# Altium PCB MIN_MOW_03 IR_V3 PCB.PcbDoc
Units mm, origin at the board's own origin, x right, y up, seen from the top; angles counter-clockwise.
Board outline 12.5 x 38 mm, 4 copper layers (Top Layer, Mid-Layer 1, Mid-Layer 2, Bottom Layer), stack 1 mm thick; 44 components, 22 nets, 95 pads, 52 vias.
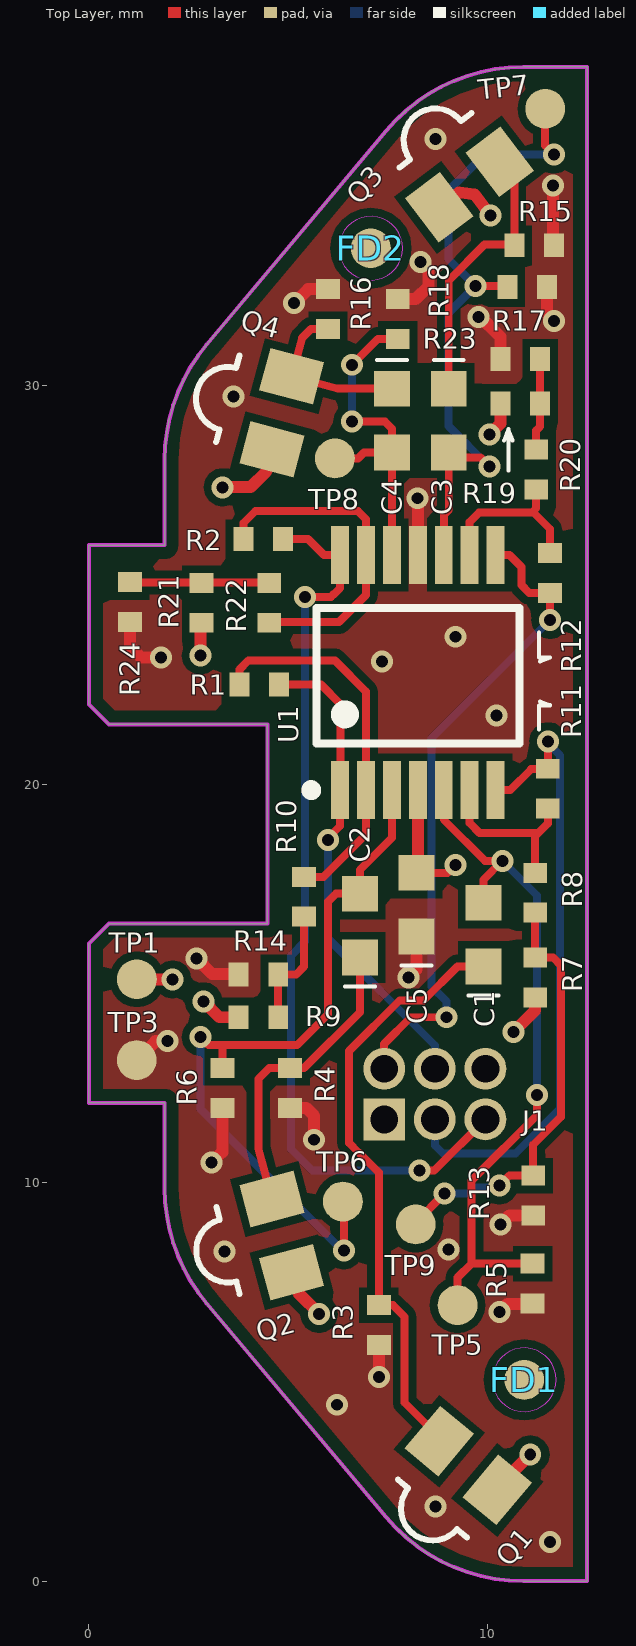
[diagram p0: Top Layer view]
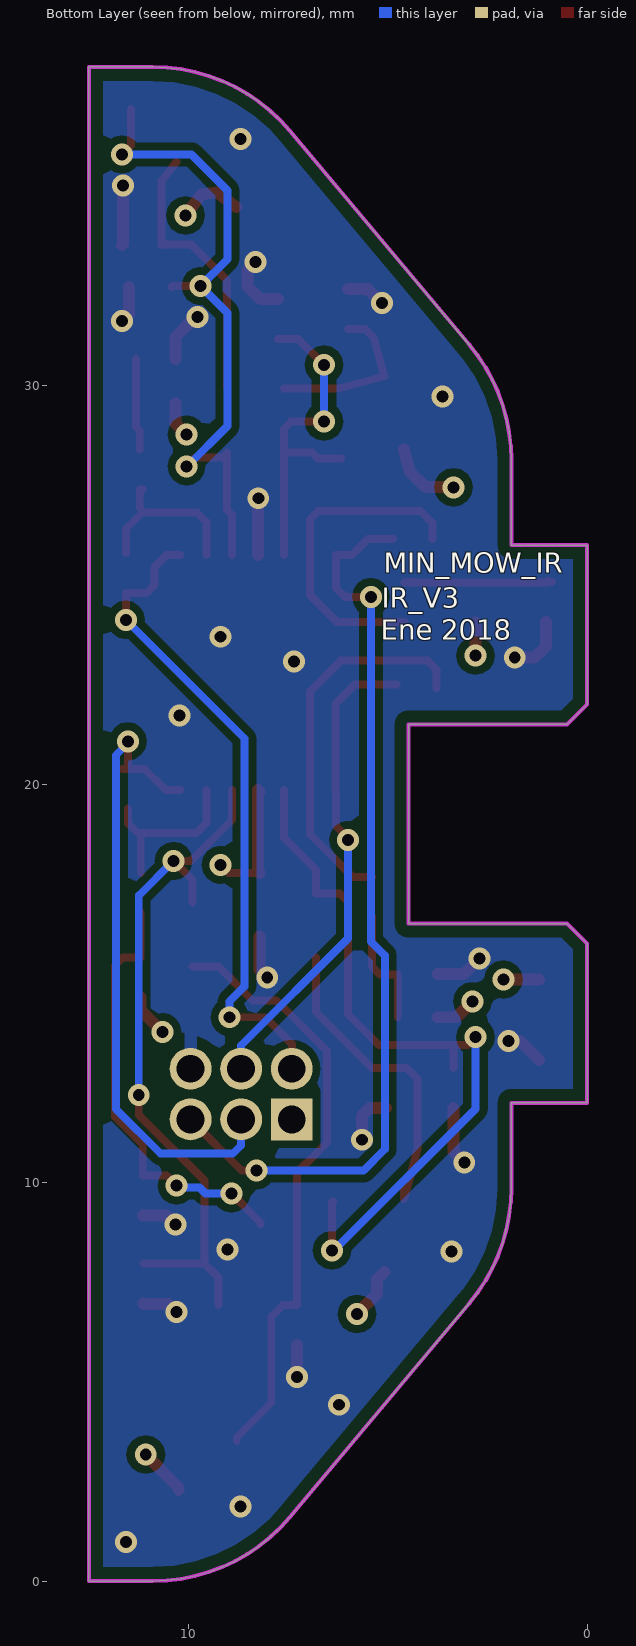
[diagram p1: Bottom Layer view, seen from below]
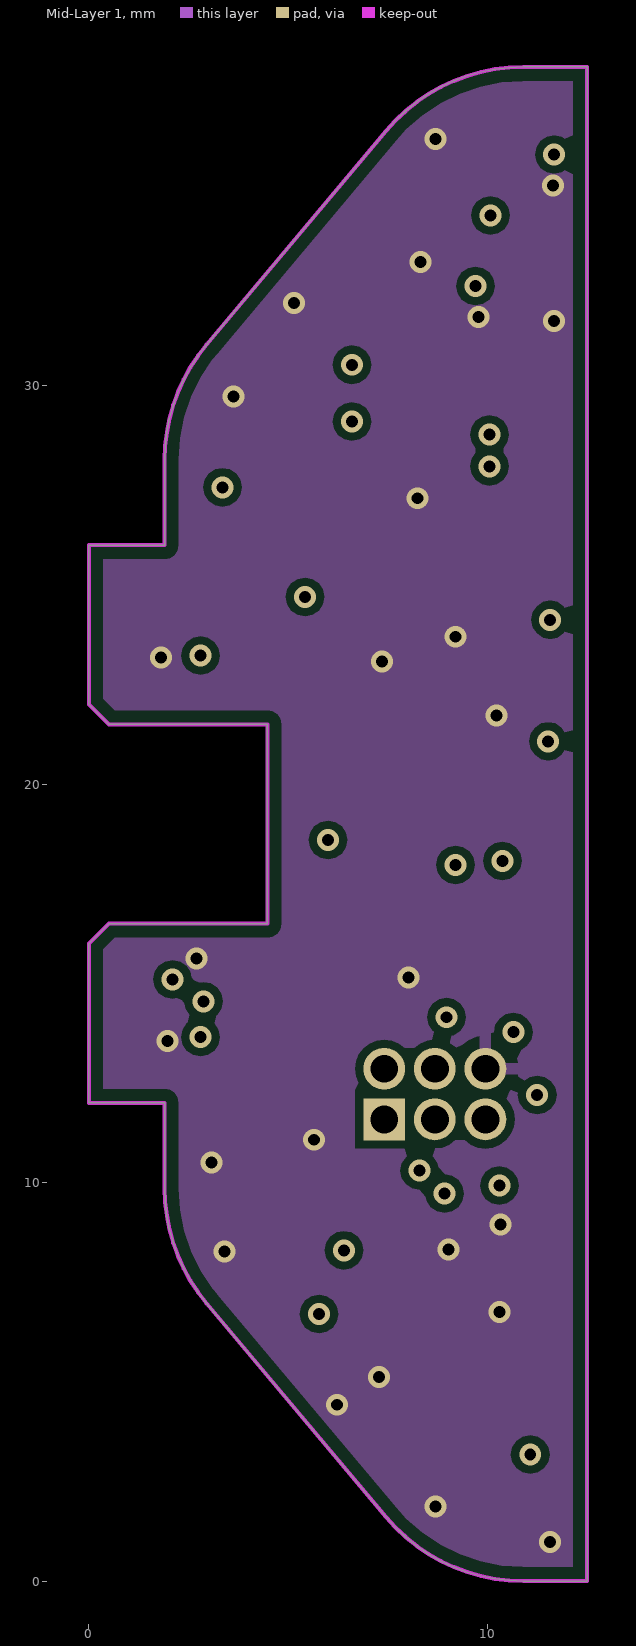
[diagram p2: Mid-Layer 1]
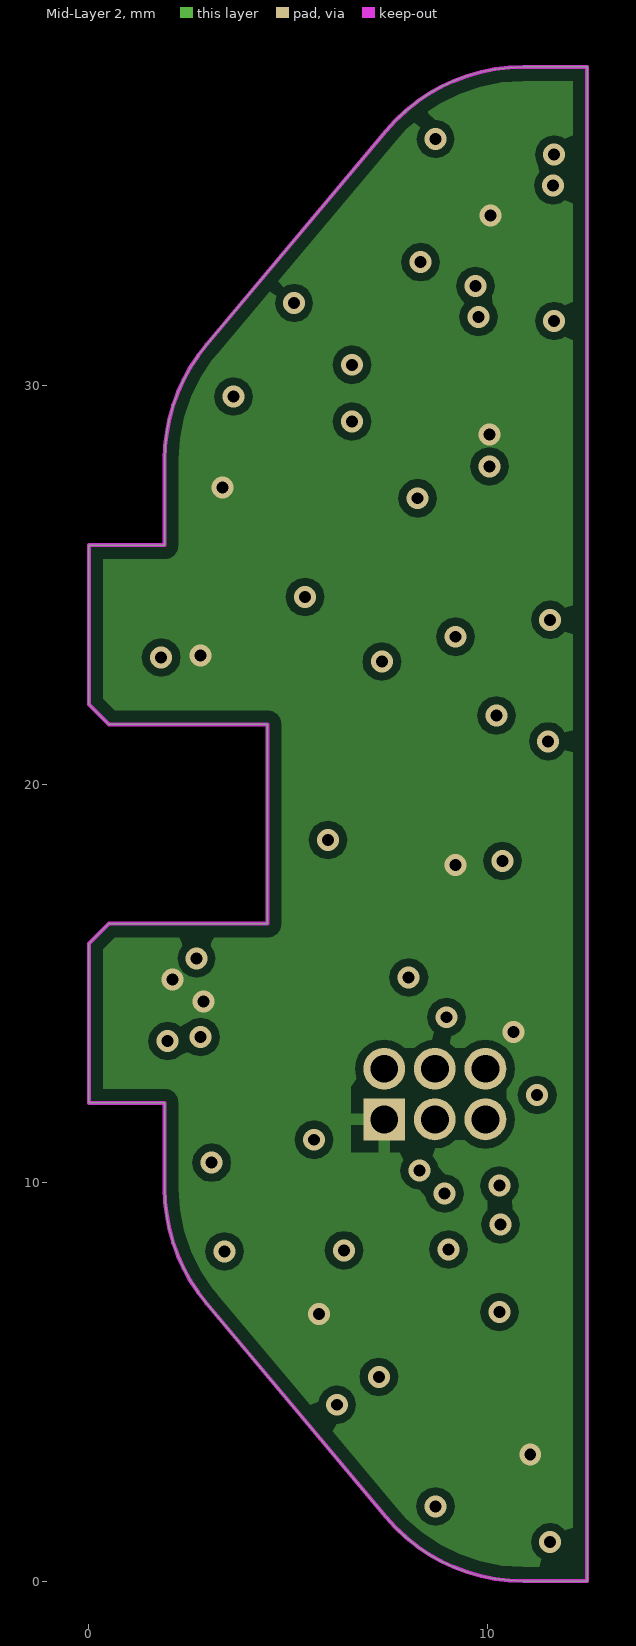
[diagram p3: Mid-Layer 2]
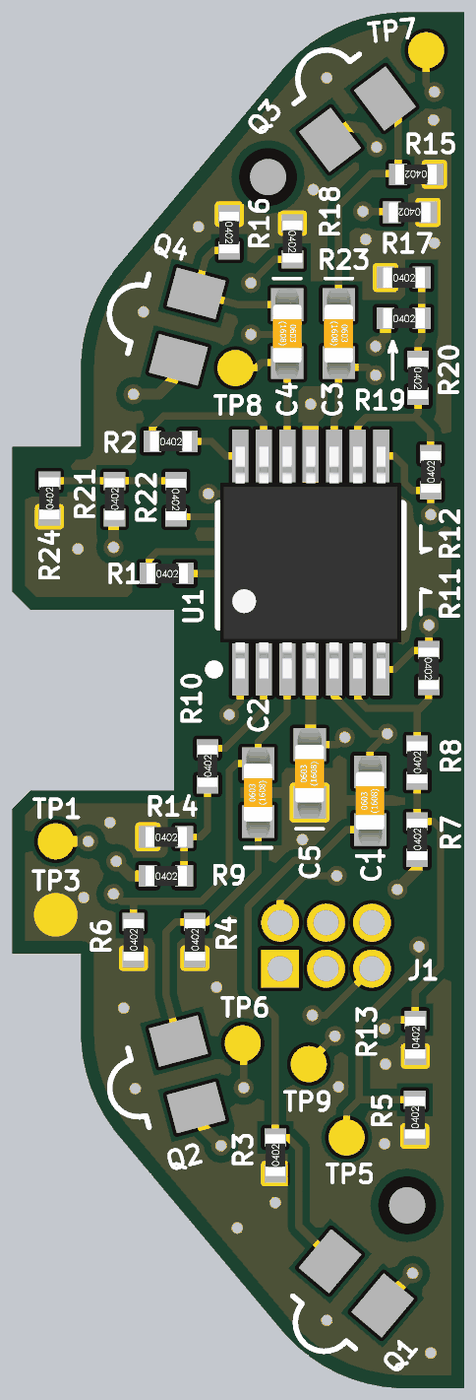
[diagram p4: 3D render of the assembled board from above, using the file's embedded part models]

## Layer stack, top to bottom
Top Layer: signal copper 0.035
Dielectric1: prepreg 0.18, Dk 4.2
Mid-Layer 1: signal copper 0.035
Dielectric 2: core 0.5, Dk 4.2
Mid-Layer 2: signal copper 0.035
Dielectric 2: prepreg 0.18, Dk 4.2
Bottom Layer: signal copper 0.035

## Board outline
0,12 0,16 0.5,16.5 4.48,16.5 4.48,21.5 0.5,21.5 0,22 0,26 1.9,26 1.9,28.137 cw(c6.4,28.137) 2.953,31.03 7.453,36.392 cw(c10.9,33.5) 10.9,38 12.5,38 12.5,0 10.9,0 cw(c10.9,4.5) 7.453,1.607 2.953,6.97 cw(c6.4,9.863) 1.9,9.863 1.9,12

## Design rules (kind name [scope] priority, off if disabled: settings)
Clearance Clearance_Antenna [InNetClass('Antenna')] p1: gap=0.2 ignorepadtopadclearanceinfootprint=FALSE except(0: Arc-Hole Track-Hole SMDPad-Hole THPad-Hole Via-Hole Fill-Hole Poly-Hole Region-Hole Text-Hole)
Clearance Clearance_Contorno [All vs (OnLayer('Keep-Out Layer'))] p2: gap=0.5 ignorepadtopadclearanceinfootprint=FALSE except(0: Arc-Hole Track-Hole SMDPad-Hole THPad-Hole Via-Hole Fill-Hole Poly-Hole Region-Hole Text-Hole; 0.3: Arc-Fill Arc-Poly Arc-Region Track-Fill Track-Poly Track-Region SMDPad-Fill SMDPad-Poly SMDPad-Region THPad-Fill THPad-Poly THPad-Region Via-Fill Via-Poly Via-Region Fill-Fill Fill-Poly Fill-Region Poly-Poly Poly-Region Region-Region)
Clearance Clearance_Poly [All vs IsRegion] p3: gap=0.2 ignorepadtopadclearanceinfootprint=FALSE except(0: Arc-Hole Track-Hole SMDPad-Hole THPad-Hole Via-Hole Fill-Hole Poly-Hole Region-Hole Text-Hole)
Clearance [All] p4: gap=0.2 ignorepadtopadclearanceinfootprint=FALSE except(0: Arc-Hole Track-Hole SMDPad-Hole THPad-Hole Via-Hole Fill-Hole Poly-Hole Region-Hole Text-Hole)
HoleSize [All] p1: absolutevalues=TRUE maxlimit=5 minlimit=0.3 maxpercent=80.000 minpercent=20.000
HoleToHoleClearance [All] p1: gap=0.4 allowstackedmicrovias=TRUE
MinimumSolderMaskSliver [InComponent('J1') vs InComponent('J1')] p1: minsoldermaskwidth=0
PlaneClearance [All] p1: clearance=0.4
PlaneConnect [All] p1: planeconnectstyle=Direct reliefexpansion=0.2 reliefentries=4 reliefconductorwidth=0.25 reliefairgap=0.25
PolygonConnect PolygonConnect_1 [InComponent('J1')] p1: connectstyle=Relief reliefconductorwidth=0.3 reliefentries=4 polygonreliefangle="90 Angle" airgapwidth=0.3
PolygonConnect [All] p2: connectstyle=Direct reliefconductorwidth=0.254 reliefentries=4 polygonreliefangle="90 Angle" airgapwidth=0.254
RoutingVias [All] p1: holewidth=0.4 width=0.8 viastyle="Through Hole" minholewidth=0.3 minwidth=0.66 maxholewidth=0.6 maxwidth=1.2
SilkToSilkClearance SilkToSilkClearance_2 [InComponent('C1') vs InComponent('C1')] p1: silktosilkclearance=0.01
SilkToSilkClearance SilkToSilkClearance_1 [InComponent('R19') vs InComponent('R20','R23')] p2: silktosilkclearance=0
SilkToSilkClearance [All] p3: silktosilkclearance=0.15
SilkToSolderMaskClearance SilkToSolderMaskClearance_8 [InComponent('TP7') vs InComponent('TP7')] p1: minsilkscreentomaskgap=0.01 clearancetoexposedcopper=TRUE
SilkToSolderMaskClearance SilkToSolderMaskClearance_7 [InComponent('FD4') vs InComponent('Q3')] p2: minsilkscreentomaskgap=0.01 clearancetoexposedcopper=TRUE
SilkToSolderMaskClearance SilkToSolderMaskClearance_6 [InComponent('R18') vs InComponent('R18')] p3: minsilkscreentomaskgap=0.01 clearancetoexposedcopper=TRUE
SilkToSolderMaskClearance SilkToSolderMaskClearance_5 [InComponent('TP2','TP3') vs InComponent('TP2','TP3')] p4: minsilkscreentomaskgap=0.01 clearancetoexposedcopper=TRUE
SilkToSolderMaskClearance SilkToSolderMaskClearance_4 [InComponent('R7','R8') vs InComponent('R7','R8')] p5: minsilkscreentomaskgap=0.01 clearancetoexposedcopper=TRUE
SilkToSolderMaskClearance SilkToSolderMaskClearance_3 [InComponent('R16') vs InComponent('R18','R16')] p6: minsilkscreentomaskgap=0.01 clearancetoexposedcopper=TRUE
SilkToSolderMaskClearance SilkToSolderMaskClearance_2 [InComponent('TP1') vs InComponent('TP1')] p7: minsilkscreentomaskgap=0.01 clearancetoexposedcopper=TRUE
SilkToSolderMaskClearance SilkToSolderMaskClearance_1 [InComponent('TP4') vs InComponent('TP1','TP4')] p8: minsilkscreentomaskgap=0.01 clearancetoexposedcopper=TRUE
SilkToSolderMaskClearance [IsPad] p9: minsilkscreentomaskgap=0.2 clearancetoexposedcopper=TRUE
SolderMaskExpansion [All] p1: expansion=0.102
Width Width_Antenna [InNetClass('Antenna')] p1: maxlimit=0.254 minlimit=0.254 preferedwidth=0.254
Width [All] p2: maxlimit=1 minlimit=0.15 preferedwidth=0.3 midlayer1_minwidth=0.254 midlayer1_maxwidth=0.254 midlayer1_prefwidth=0.254 midlayer2_minwidth=0.254 midlayer2_maxwidth=0.254 midlayer2_prefwidth=0.254 minimp=50.000000 maximp=50.000000 favimp=50.000000
23 further rules are at their usual default settings.

## Components (designator, comment, footprint, x,y, rotation, side; value= is the part's Value field where it differs from the comment)
C1 "C22NV10X7R0603" C0603 9.9,15.425 r90 top value=22nF
C2 "C22NV10X7R0603" C0603 6.8,15.65 r90 top value=22nF
C3 "C22NV10X7R0603" C0603 9.03,29.925 r270 top value=22nF
C4 "C22NV10X7R0603" C0603 7.605,29.925 r270 top value=22nF
C5 "C100NV10X7R0603" C0603 8.225,16.175 r90 top value=100nF
FD1 "FIDUCIAL" FIDUCIAL 10.925,5.05 r0 top
FD2 "FIDUCIAL" FIDUCIAL 7.075,33.45 r90 top
J1 "PAD_6PIN_3X2_1.05MM_1.27MM_PITCH" PAD_6PIN_3X2_1.05MM_1.27MM_PITCH 7.41,11.587 r0 top locked
Q1 "PT100MF0MP" PT100MF0MP_SIDE 9.519,2.898 r320 top locked value=35V/0.02A
Q2 "PT100MF0MP" PT100MF0MP_SIDE 4.84,8.669 r285 top locked value=35V/0.02A
Q3 "PT100MF0MP" PT100MF0MP_SIDE 9.549,35.047 r217 top locked value=35V/0.02A
Q4 "PT100MF0MP" PT100MF0MP_SIDE 4.84,29.319 r255 top locked value=35V/0.02A
R1 "R39KT10402" R0402 3.775,22.5 r0 top value=39kOhm
R2 "R39KT10402" R0402 3.875,26.15 r0 top value=39kOhm
R3 "R4K7T10402" R0402 7.275,5.925 r90 top value=4.7kOhm
R4 "R4K7T10402" R0402 5.05,11.875 r90 top value=4.7kOhm
R5 "R4K7T10402" R0402 11.135,6.966 r90 top value=4.7kOhm
R6 "R4K7T10402" R0402 3.35,11.875 r90 top value=4.7kOhm
R7 "R22KT10402" R0402 11.2,14.65 r90 top value=22kOhm
R8 "R1KT10402" R0402 11.2,16.775 r90 top value=1kOhm
R9 "R22KT10402" R0402 3.75,14.15 r0 top value=22kOhm
R10 "R1KT10402" R0402 5.4,16.675 r90 top value=1kOhm
R11 "R39KT10402" R0402 11.516,20.386 r270 top value=39kOhm
R12 "R39KT10402" R0402 11.575,24.8 r90 top value=39kOhm
R13 "R100T10402" R0402 11.15,9.175 r90 top value=100Ohm
R14 "R100T10402" R0402 3.75,15.225 r0 top value=100Ohm
R15 "R4K7T10402" R0402 11.675,33.525 r180 top value=4.7kOhm
R16 "R4K7T10402" R0402 6,32.425 r270 top value=4.7kOhm
R17 "R4K7T10402" R0402 11.5,32.475 r180 top value=4.7kOhm
R18 "R4K7T10402" R0402 7.75,32.175 r270 top value=4.7kOhm
R19 "R22KT10402" R0402 10.325,29.55 r0 top value=22kOhm
R20 "R1KT10402" R0402 11.225,28.4 r270 top value=1kOhm
R21 "R22KT10402" R0402 2.825,24.05 r90 top value=22kOhm
R22 "R1KT10402" R0402 4.525,25.05 r270 top value=1kOhm
R23 "R100T10402" R0402 10.325,30.675 r0 top value=100Ohm
R24 "R100T10402" R0402 1.026,24.069 r90 top value=100Ohm
TP1 "TEST_POINT_1MM" TEST_POINT_1MM 1.203,15.103 r90 top
TP3 "TEST_POINT_1MM" TEST_POINT_1MM 1.2,13.075 r90 top
TP5 "TEST_POINT_1MM" TEST_POINT_1MM 9.25,6.925 r90 top
TP6 "TEST_POINT_1MM" TEST_POINT_1MM 6.375,9.525 r90 top
TP7 "TEST_POINT_1MM" TEST_POINT_1MM 11.45,36.95 r90 top
TP8 "TEST_POINT_1MM" TEST_POINT_1MM 6.175,28.175 r90 top
TP9 "TEST_POINT_1MM" TEST_POINT_1MM 8.2,8.95 r90 top
U1 "MCP6004IST" TSSOP14_MCP 6.305,19.85 r0 top

## Footprints (in the part's own frame and the unit in brackets; to place one, negate y for a bottom-side part, rotate by r counter-clockwise, add the part's x,y. Pads: shape width x height; smd on the part's side, far side on the other; paste and mask are expansions set on the pad)
C0603 [mm]
  rect 0.9x0.9 smd: 1(0,0) 2(1.6,0)
  silkscreen extent -0.72,-0.38 -0.72,0.38, body extent -0.43,-0.4 2.03,0.4, height 0.8
FIDUCIAL [mm]
  round 1 smd mask+0.3: 0(0,0)
  Top Layer keep-out circle w0.02: c0,0 r0.8
PAD_6PIN_3X2_1.05MM_1.27MM_PITCH [mm]
  rect 1.05x1.05 hole 0.7: 1(0,0)
  round 1.05 hole 0.7: 2(0,1.27) 3(1.27,0) 4(1.27,1.27) 5(2.54,0) 6(2.54,1.27)
PT100MF0MP_SIDE [mm]
  rect 1.1x1.4 smd: 1(-0.95,0) 2(0.95,0)
  silkscreen extent -1.12,-2.2 1.14,-1.4, body extent -1.5,-2.2 1.5,0, height 1.51
R0402 [mm]
  rect 0.5x0.6 smd: 1(0,0) 2(1,0)
  body extent -0.07,-0.27 1.08,0.28, height 0.41
TEST_POINT_1MM [mm]
  round 1 smd paste-1: 1(0,0)
TSSOP14_MCP [mm]
  rect 0.45x1.45 smd: 1(0,0) 2(0.65,0) 3(1.3,0) 4(1.95,0) 5(2.6,0) 6(3.25,0) 7(3.9,0) 8(3.9,5.9) 9(3.25,5.9) 10(2.6,5.9) 11(1.95,5.9) 12(1.3,5.9) 13(0.65,5.9) 14(0,5.9)
  silkscreen extent -0.85,-0.12 4.5,4.57, body extent -0.55,-0.25 4.45,6.15, height 1.2

## Part data
C1 C2 C3 C4: "CAPACITOR SMD 0603, 22nF , 10V, X7R", Dielectric=X7R, Voltage=10, Part Number=C22NV10X7R0603, Type=Passive/Capacitor
C5: "CAPACITOR SMD 0603, 100nF, 10V, X7R", Dielectric=X7R, Voltage=10, Part Number=C100NV10X7R0603, Type=Passive/Capacitor
Q1 Q2 Q3 Q4: library part PT100MF0MP_S, "SMT Phototransistor, 15º angle, 910nm, 3.45mA (SIDE MOUNTING)", Current=0.02, Manufacturer=SHARP, Supplier Part Number 1=852-PT100MF0MP, Voltage=35, Manufacturer Part Number=PT100MF0MP, Part Number=PT100MF0MP_S, Supplier 1=Mouser, Supplier 2=Digikey, Supplier Part Number 2=425-1006-1-ND, Type=Transistor/Photo
R1 R2 R11 R12: "RESISTOR SMD 0402, 39kOhm, 1%", Tolerance=1, Part Number=R39KT10402, Type=Passive/Resistor
R3 R4 R5 R6 R15 R16 R17 R18: "RESISTOR SMD 0402, 4.7kOhm, 1%", Tolerance=1, Part Number=R4K7T10402, Type=Passive/Resistor
R7 R9 R19 R21: "RESISTOR SMD 0402, 22kOhm, 1%", Tolerance=1, Part Number=R22KT10402, Type=Passive/Resistor
R8 R10 R20 R22: "RESISTOR SMD 0402, 1kOhm, 1%", Tolerance=1, Part Number=R1KT10402, Type=Passive/Resistor
R13 R14 R23 R24: "RESISTOR SMD 0402, 100Ohm, 1%", Tolerance=1, Part Number=R100T10402, Type=Passive/Resistor
U1: "1MHz Low-Power Op Amp", Manufacturer=MICROCHIP, Manufacturer Part Number=MCP6004-I/ST, Supplier Part Number 1=MCP6004-I/ST-ND, Part Number=MCP6004IST, Supplier 1=Digikey, Supplier 2=Mouser, Supplier Part Number 2=579-MCP6004-I/ST, Type="Operational Amplifier"
FD1 FD2: Part Number=FIDUCIAL, Type=Miscellaneous
J1: Part Number=PAD_6PIN_3X2_1.05MM_1.27MM_PITCH, Type=Connector
TP1 TP3 TP5 TP6 TP7 TP8 TP9: Part Number=TEST_POINT_1MM, Type=Miscellaneous

## Via types
v1: diameter 0.55, hole 0.3, Top Layer to Bottom Layer, tented both sides, 52 vias

## Nets (pads, with @x,y where several pads share a name; then routed paths per layer and width w, separated by ;. In a path a pad name is that pad's centre, name@x,y a point inside that pad or via, vN(x,y) a via of type N, cw(c..) or ccw(c..) an arc to the next point about the centre after c; other vN are vias at no path point)
GND: C5.1 J1.6 R3.1 R4.1 R5.1 R6.1 R13.1 R14.1 R15.1 R16.1 R17.1 R18.1 R23.1 R24.1 TP3.1 U1.11 | length 18.1
  Top Layer w0.3: R24.1 1.026,23.46 1.305,23.18 v1(1.813,23.18) ; TP3.1 1.676,13.551 ; 1.676,13.55 v1(1.975,13.55) ; v1(2.7,15.625) 3.095,15.23 R14.1@3.75,15.23 ; v1(3.08,10.5) 3.35,10.77 R6.1 ; R4.1 5.45,11.875 5.65,11.675 v1(5.65,11.075) ; v1(5.15,32.075) 5.5,32.425 R16.1 ; v1(7.275,5.125) R3.1 ; R18.1 8.2,32.175 8.525,32.5 8.525,32.9 v1(8.325,33.1) ; v1(8.025,15.15) 8.225,15.35 C5.1 ; v1(8.25,27.175) 8.255,27.17 U1.11 ; v1@9.727,31.727 v1@9.775,31.775 ; v1(9.775,31.727) 9.775,31.775 10.325,31.225 R23.1 ; v1(10.3,6.75) 10.505,6.955 R5.1@11.126,6.955 ; v1(10.325,8.95) 10.55,9.175 R13.1 ; R5.1@11.125,6.956 R5.1 ; R17.1 11.5,31.8 v1(11.675,31.625) ; v1(11.65,35.025) 11.65,33.55 R15.1
  other v1: 11.575,0.975 8.7,1.875 6.225,4.425 3.4,8.275 9.025,8.325 10.225,21.725 7.35,23.075 9.2,23.7 3.625,29.725 8.7,36.19
NetC1_1: C1.1 Q1.1 R3.2 | length 15.2
  Top Layer w0.2: Q1.1 8.791,3.611 7.925,4.477 7.925,6.625 7.625,6.925 R3.2 7.275,10.25 6.763,10.762 6.761,10.762 6.525,10.998 6.525,13.3 7.8,14.575 8.4,14.575 9.25,15.425 C1.1
NetC1_2: C1.2 R5.2 TP5.1 U1.5 | length 17.8
  Top Layer w0.2: U1.5 8.905,19.108 9.938,18.075 v1(10.375,18.075) 9.9,17.6 C1.2 ; TP5.1 9.25,7.616 9.6,7.966 ; R5.2 9.6,7.966 ; v1(11.25,12.2) 11.25,11.7 9.6,10.05 9.6,7.966
  Bottom Layer w0.2: v1(10.375,18.075) 11.25,17.2 v1(11.25,12.2)
NetC2_1: C2.1 Q2.1 R4.2 | length 8.1
  Top Layer w0.2: Q2.1@4.594,9.981 Q2.1 4.251,10.866 4.249,12.599 4.525,12.875 R4.2 5.4,12.875 6.8,14.275 C2.1
NetC2_2: C2.2 R6.2 TP6.1 U1.3 | length 18.9
  Top Layer w0.2: v1(2.8,13.651) 3.001,13.45 3.35,13.45 ; R6.2 3.35,13.45 ; TP6.1 6.4,9.5 v1(6.4,8.3) ; U1.3 7.605,18.655 6.8,17.85 C2.2 6.2,17.25 6,17.05 6,14.225 5.225,13.45 3.35,13.45
  Bottom Layer w0.2: v1(2.8,13.651) 2.8,11.85 6.375,8.275 v1(6.4,8.3)
NetC3_1: C3.1 Q3.1 R15.2 | length 7
  Top Layer w0.2: C3.1 9.03,32.643 9.93,33.543 R15.2@10.675,33.543 ; Q3.1 10.675,35.132 R15.2@10.675,33.543 ; R15.2 R15.2@10.675,33.543
NetC3_2: C3.2 R17.2 TP7.1 U1.10 | length 16.7
  Top Layer w0.2: U1.10 8.905,26.75 9.03,26.875 C3.2 9.155,28.2 9.827,28.2 v1(10.05,27.976) ; v1@9.681,32.494 9.686,32.5 v1(9.7,32.5) R17.2@10.4,32.5 ; R17.2@10.4,32.5 R17.2@10.425,32.475 ; TP7.1 11.45,36.025 v1(11.675,35.8)
  Bottom Layer w0.2: v1(10.05,27.976) 10.035,27.976 9.025,28.987 9.025,31.825 v1(9.7,32.5) 9.025,33.175 9.025,34.9 9.925,35.8 v1(11.675,35.8)
NetC4_1: C4.1 Q4.1 R16.2 | length 4.3
  Top Layer w0.2: R16.2 5.575,31.425 5.35,31.2 Q4.1 6.25,29.925 C4.1
NetC4_2: C4.2 R18.2 TP8.1 U1.12 | length 8.5
  Top Layer w0.2: TP8.1 6.75,28.175 6.9,28.325 C4.2 7.605,28.92 7.425,29.1 v1(6.6,29.1) ; v1(6.6,30.525) 7.25,31.175 R18.2 ; U1.12 C4.2@7.605,28.225
  Bottom Layer w0.2: v1(6.6,29.1) v1(6.6,30.525)
NetJ1_2: J1.2 R12.1 U1.8 | length 16.5
  Top Layer w0.2: J1.2 7.403,12.864 7.403,13.478 8.075,14.15 v1(8.975,14.15) ; U1.8 10.555,25.75 10.852,25.452 10.852,24.998 11.05,24.8 R12.1 v1(11.575,24.125)
  Bottom Layer w0.2: v1(8.975,14.15) 8.975,14.55 8.6,14.925 8.6,21.15 v1(11.575,24.125)
NetJ1_3: J1.3 R11.1 U1.7 | length 16.3
  Top Layer w0.2: U1.7 10.573,19.85 11.098,20.375 R11.1@11.655,20.375 ; R11.1 11.525,20.395 v1(11.525,21.075)
  Bottom Layer w0.2: J1.3@8.68,11.837 J1.3 8.68,10.937 8.892,10.725 10.7,10.725 11.825,11.85 11.825,20.725 11.525,21.025 v1@11.525,21.05 ; v1@11.497,21.021 v1@11.525,21.05 ; v1(11.525,21.075) v1@11.525,21.05
NetJ1_4: J1.4 R1.2 U1.1 | length 12.1
  Top Layer w0.2: R1.2 5.821,22.5 6.309,22.012 6.309,19.854 U1.1 ; v1(6,18.6) 5.975,18.625 6.305,18.955 U1.1@6.305,19.775
  Bottom Layer w0.2: v1(6,18.6) 6,16.125 8.68,13.445 J1.4
NetJ1_5: J1.5 R2.2 U1.14 | length 23.3
  Top Layer w0.2: R2.2 5.5,26.15 5.9,25.75 U1.14 6.305,24.925 6.13,24.75 6.125,24.755 6.07,24.7 v1(5.425,24.7) ; v1(8.3,10.3) 8.663,10.3 J1.5 9.95,11.837 J1.5@9.962,11.825
  Bottom Layer w0.2: v1(5.425,24.7) 5.425,16.05 5.075,15.7 5.075,10.837 5.612,10.3 v1(8.3,10.3)
NetR1_1: R1.1 R10.2 U1.2 | length 9.6
  Top Layer w0.2: R1.1@3.78,22.4 3.78,22.88 4,23.1 6.175,23.1 6.955,22.32 U1.2 6.955,18.742 5.888,17.675 R10.2
NetR2_1: R2.1 R22.2 U1.13 | length 8.2
  Top Layer w0.2: R2.1 3.875,26.55 4.175,26.85 6.754,26.85 6.955,26.649 U1.13 6.955,24.75 6.274,24.069 R22.2@4.582,24.069
NetR7_2: R7.2 R8.1 R13.2 TP9.1 | length 10.9
  Top Layer w0.2: TP9.1 8.2,9 v1(8.925,9.725) ; v1(10.3,9.925) 10.55,10.175 R13.2 11.15,10.95 11.85,11.65 11.85,15.45 11.65,15.65 R7.2 R8.1
  Bottom Layer w0.2: v1(8.925,9.725) 9.575,9.725 9.725,9.875 10.3,9.875 v1(10.3,9.925)
NetR8_2: R8.2 R11.2 U1.6 | length 4.4
  Top Layer w0.2: U1.6 9.555,19.024 9.804,18.775 11.275,18.775 ; R8.2 11.2,18.7 11.275,18.775 ; R11.2 11.516,19.016 11.275,18.775
NetR9_2: R9.2 R10.1 R14.2 | length 3.1
  Top Layer w0.2: R9.2 R14.2 5.2,15.225 5.4,15.425 R10.1
NetR12_2: R12.2 R20.2 U1.9 | length 4.3
  Top Layer w0.2: U1.9 9.555,26.58 9.787,26.812 11.113,26.812 ; R20.2 11.225,26.925 11.113,26.812 ; R12.2@11.567,25.8 11.567,26.408 11.163,26.812 11.113,26.812
NetR19_2: R19.2 R20.1 R23.2 | length 2.3
  Top Layer w0.2: R20.1 11.225,28.875 11.325,28.975 R19.2 R23.2
NetR21_2: R21.2 R22.1 R24.2 | length 3.9
  Top Layer w0.2: R24.2@0.873,25.069 0.967,25.092 R24.2@0.975,25.095 ; R24.2@0.975,25.06 R21.2@2.804,25.06 ; R21.2@2.804,25.064 2.825,25.064 R22.1@4.582,25.06 ; R22.1@4.33,25.075 R22.1@4.48,25.075
VCC: C5.2 J1.1 Q1.2 Q2.2 Q3.2 Q4.2 R7.1 R9.1 R19.1 R21.1 TP1.1 U1.4 | length 14
  Top Layer w0.2: C5.2 9,17.775 v1(9.2,17.975)
  Top Layer w0.3: TP1.1 2.098,15.103 v1(2.1,15.101) ; v1(2.8,23.225) 2.804,23.229 R21.1@2.804,24.06 ; v1(2.875,14.55) 3.275,14.15 R9.1 ; v1(3.35,27.45) 3.346,27.454 4.054,27.454 4.445,27.845 Q4.2 ; Q2.2 5.275,7.562 5.275,7.205 5.775,6.705 v1(5.775,6.7) ; C5.2 8.255,17.805 U1.4 U1.4@8.225,19.82 ; Q3.2@8.8,34.483 9.293,34.854 9.68,34.799 v1(10.075,34.275) ; v1(10.05,28.775) 10.325,29.05 R19.1 ; Q1.2 10.246,2.346 v1(11.075,3.175) ; v1(10.65,13.775) 11.2,14.325 R7.1
pads on no net: FD1.0 FD2.0

## Polygon pours and split planes (outlines as drawn)
GND on Mid-Layer 1 "GND_MID1" (solid, remove dead copper, pour order 0): 12.5,0 12.5,38 -0.004,38 -0.016,37.988 -0.016,0.015
VCC on Mid-Layer 2 "VCC_MID2" (solid, remove dead copper, pour order 2): 12.5,0 12.5,38 12.486,38.014 -0.016,38.014 -0.016,-0.01
GND on Bottom Layer "GND_BOT" (solid, remove dead copper, pour order 4): 12.5,0 12.5,38 12.486,38.014 -0.016,38.014 -0.016,-0.01
GND on Top Layer "GND_TOP" (solid, remove dead copper, pour order 8): 12.465,-0.051 -0.035,-0.051 -0.035,1.556 -0.035,1.724 -0.035,37.949 12.465,37.949

## Keep-outs
Keep-Out Layer:
  the board outline again, w0.1

## Silkscreen, mask and mechanical layers (free items; w line width, h text height)
Top Overlay:
  lines w0.1: 10.422,28.625 10.525,28.908 ; 10.525,27.875 10.525,28.908 ; 10.628,28.625 10.525,28.908 ; 11.3,21.37 11.3,21.98 11.575,21.98 ; 11.3,23.81 11.3,23.175 ; 11.317,22.075 11.575,21.981 ; 11.317,23.081 11.575,23.175 ; 11.3,23.175 11.575,23.175 ; 11.3,23.175 11.575,23.175
Bottom Overlay:
  text "MIN_MOW_IR" at 5.1,25.3 h0.5
  text "IR_V3" at 5.15,24.425 h0.5
  text "Ene 2018" at 5.175,23.625 h0.5
Mechanical 2:
  lines w0.1: 0,26 0,0 12.5,0
Mechanical 3:
  circle w0.1: c9.95,11.837 r0.35
  circle w0.1: c9.95,13.107 r0.35
  circle w0.1: c8.68,11.837 r0.35
  circle w0.1: c8.68,13.107 r0.35
  circle w0.1: c7.41,13.107 r0.35
  circle w0.1: c7.41,11.837 r0.35
  lines w0.1: 0,12 1.9,12 1.9,9.863 ccw(c6.396,9.861) 2.953,6.97 7.453,1.607 ccw(c10.901,4.503) 10.9,0 12.5,0 12.5,38 10.9,38 ccw(c10.901,33.497) 7.453,36.393 2.953,31.03 ccw(c6.396,28.139) 1.9,28.137 1.9,26 0,26 0,22 0.5,21.5 4.48,21.5 4.48,16.5 0.5,16.5 0,16 0,12 ; 3.132,9.653 4.066,10.03 4.453,10.134 5.232,7.237 4.846,7.133 3.848,6.991 3.698,7.549 cw(c3.49,8.322) 3.282,9.095 3.132,9.653 ; 3.144,28.341 4.082,27.972 4.469,27.872 5.221,30.777 4.833,30.877 3.835,31.009 3.69,30.45 ccw(c3.49,29.675) 3.289,28.901 3.144,28.341 ; 7.598,35.362 8.06,35.709 cw(c8.7,36.19) 9.339,36.671 9.801,37.018 10.5,36.292 10.74,35.972 8.342,34.169 8.102,34.489 7.598,35.362 ; 7.628,2.698 8.073,2.33 ccw(c8.688,1.819) 9.304,1.308 9.749,0.94 10.481,1.631 10.737,1.939 8.427,3.854 8.172,3.546 7.628,2.698